# EAGLE board Discrete Datalogger ECU rev2 (EAGLE 8.6.0)
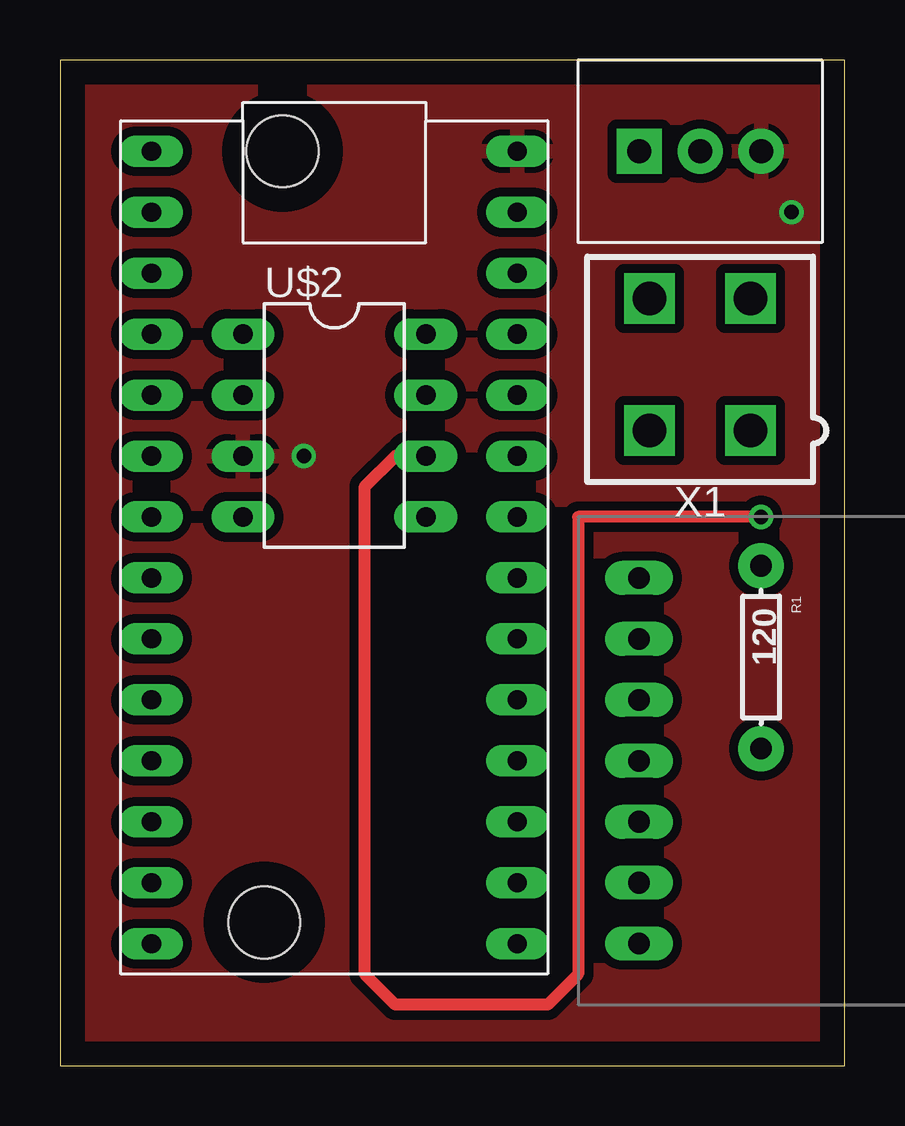
[diagram p0: board, top side]
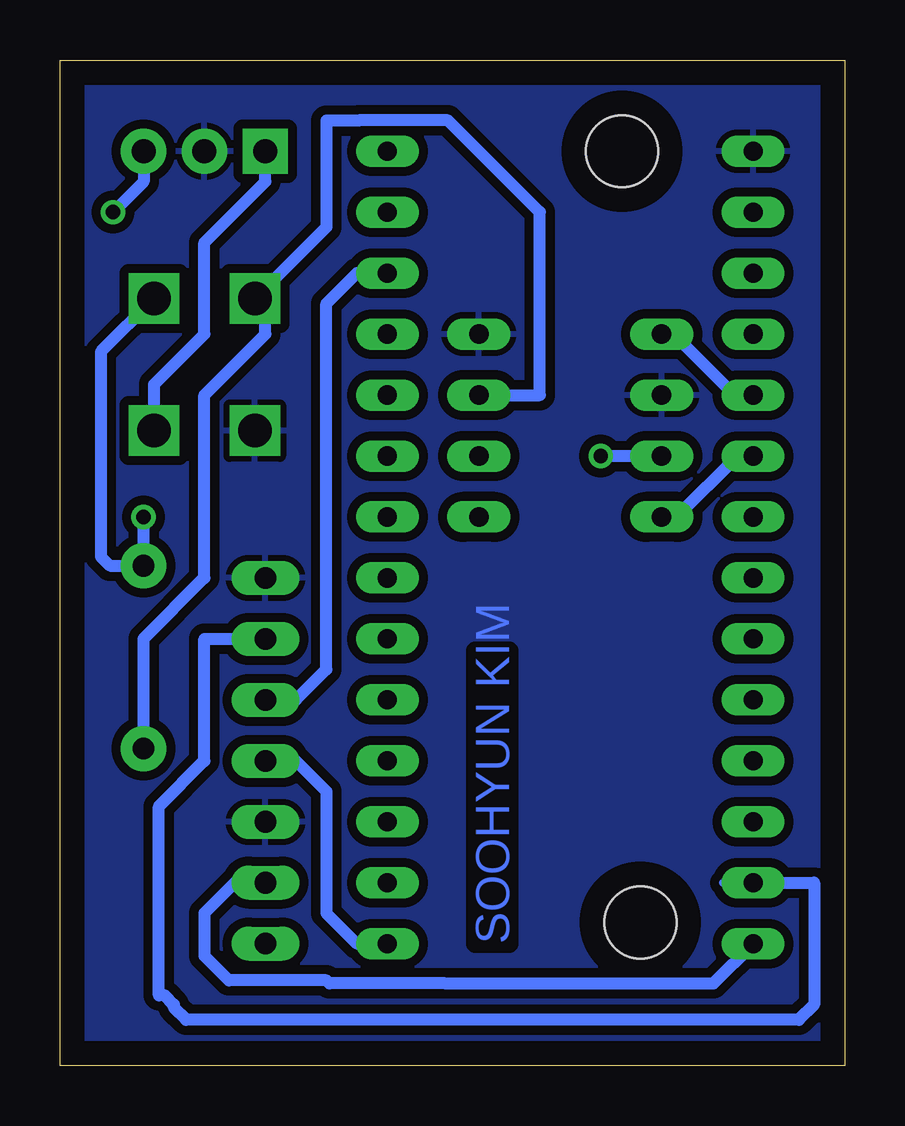
[diagram p1: board, bottom side, seen from below]

Size 32.69 x 41.9 mm. Coordinates in mm from the lower left corner, seen from the top.
Outline: 0,0 32.69,0 32.69,41.9 0,41.9 0,0
Copper layers (1*16): Top 0.035mm / dielectric 1.5mm / Bottom 0.035mm
Design rules "default *": minimum track width 6mil, minimum drill 0.35mm, track to track 15mil, track to pad 15mil, pad to pad 15mil, via to via 15mil, smd to smd 6mil, copper to edge 40mil, drill to drill 6mil, minimum pad ring 10mil, minimum via ring 8mil, stop-mask expansion 4mil, vias tented up to drill 0mil, thermal gap 10mil
Holes 3 mm at 8.51,5.97 9.27,38.1

## Footprints (pad centres in the part's own frame; a part is rotated, then mirrored left to right if it is on the bottom)
TO-220 = drill 1 pad 1.88 square: 1 -2.54,0 | drill 1 pad 1.88: 2 0,0; 3 2.54,0
AXIAL-0.3 = drill 0.9 pad 1.88: P$1 -3.81,0; P$2 3.81,0
TEENSY_3.2_SIMPLE = drill 0.8 long: 3.3V 16.51,29.21; A0 16.51,3.81; A1 16.51,6.35; A2 16.51,8.89; A3 16.51,11.43; A4 16.51,13.97; A5 16.51,16.51; A6 16.51,19.05; A7 16.51,21.59; A8 16.51,24.13; A9 16.51,26.67; AGND 16.51,31.75; D0(RX1) 1.27,31.75; D1(TX1) 1.27,29.21; D2 1.27,26.67; D3(CANTX) 1.27,24.13; D4(CANRX) 1.27,21.59; D5 1.27,19.05; D6 1.27,16.51; D7(RX3) 1.27,13.97; D8(TX3) 1.27,11.43; D9(RX2) 1.27,8.89; D10(TX2) 1.27,6.35; D11 1.27,3.81; D12 1.27,1.27; D13 16.51,1.27; GND 1.27,34.29; VIN 16.51,34.29
DIL08 = drill 0.813 long: 1 -3.81,-3.81; 2 -1.27,-3.81; 3 1.27,-3.81; 4 3.81,-3.81; 5 3.81,3.81; 6 1.27,3.81; 7 -1.27,3.81; 8 -3.81,3.81
SDCARD_INTERFACE = drill 0.9 long: CD 2.54,0; CS 2.54,-15.24; DI 2.54,-12.7; DO 2.54,-2.54; GND 2.54,-5.08; SCK 2.54,-7.62; VCC 2.54,-10.16
MINIFIT_5566-4 = drill 1.4 square: 1 2.1,-2.75; 2 -2.1,-2.75; 3 2.1,2.75; 4 -2.1,2.75

## Placement (x,y rotation side)
IC1  [TO-220]  26.67,38.1 0 top
R1  120  [AXIAL-0.3]  29.21,17.02 270 top
U$1  TEENSY_3.2_SIMPLE  [TEENSY_3.2_SIMPLE]  2.54,3.81 0 top
U$2  MCP2551DIL  [DIL08]  11.43,26.67 270 top
U$3  SDCARD_INTERFACE  [SDCARD_INTERFACE]  26.67,5.08 180 top
X1  CONNECTOR-4  [MINIFIT_5566-4]  26.67,29.21 0 top

## Library data of the parts
IC1 R1 U$1-U$3 = HyTechDevices
X1 = HyTechDevices; OC_FARNELL: unknown; OC_NEWARK: unknown

## Nets
12V: IC1.1 X1.1
CANH: R1.P$2 U$2.7 X1.4
CANL: R1.P$1 U$2.6 X1.3
GND: IC1.2 U$1.GND U$2.2 U$2.8 U$3.CS U$3.GND X1.2
N$4: U$1.D3(CANTX) U$2.1
N$5: U$1.D4(CANRX) U$2.4
N$6: U$1.D13 U$3.SCK
N$7: U$1.D11 U$3.DI
N$8: U$1.3.3V U$3.VCC
N$9: U$1.D12 U$3.DO
VIN: IC1.3 U$1.VIN U$2.3

## Tracks (layer width: path | path; a pad name or v marks a point on that pad's centre or on a via)
12V
  Bottom 0.508: X1.1 28.77,28.38 26.67,30.48 26.67,34.29 24.13,36.83 IC1.1
CANH
  Bottom 0.508: U$2.7 12.7,27.94 12.7,35.56 16.53,39.39 20.24,39.39 20.26,39.37 21.59,39.37 21.59,34.94 24.45,32.08 | 24.45,32.08 X1.4 | 24.45,32.08 24.13,31.75 24.13,30.48 26.67,27.94 26.67,20.32 29.21,17.78 R1.P$2
CANL  (via drill 0.6)
  Top 0.508: v29.21,22.86 21.59,22.86 21.59,3.81 20.32,2.54 13.97,2.54 12.7,3.81 12.7,24.13 13.97,25.4 U$2.6
  Bottom 0.508: X1.3 30.99,29.74 30.99,21.21 30.61,20.83 R1.P$1 v29.21,22.86
GND
  pour Bottom: 0,41.91 33.02,41.91 33.02,0 0,0
N$4
  Bottom 0.508: U$1.D3(CANTX) 4.57,27.94 7.11,30.48 U$2.1
N$5
  Bottom 0.508: U$1.D4(CANRX) 4.45,25.4 6.99,22.86 U$2.4
N$6
  Bottom 0.508: U$3.SCK 22.86,12.7 21.59,11.43 21.59,6.35 20.32,5.08 U$1.D13
N$7
  Bottom 0.305: U$1.D11 5.08,7.62
  Bottom 0.508: U$1.D11 1.27,7.62 1.27,2.54 1.91,1.91 27.43,1.91 27.94,2.41 27.94,2.54 28.32,2.92 28.57,2.92 28.57,10.79 26.67,12.7 26.67,17.78 U$3.DI
N$8
  Bottom 0.508: U$3.VCC 22.86,15.24 21.59,16.51 21.59,31.75 20.32,33.02 U$1.3.3V
N$9
  Bottom 0.508: U$3.DO 25.4,7.62 26.67,6.35 26.67,4.57 25.65,3.56 21.59,3.56 21.46,3.43 16.64,3.43 16.51,3.43 5.46,3.43 U$1.D12
VIN  (via drill 0.6)
  Bottom 0.508: U$2.3 v10.16,25.4 | IC1.3 29.21,36.83 v30.48,35.56
  pour Top: 0,41.91 33.02,41.91 33.02,0 0,0

## Text on the board
Bottom: SOOHYUN KIM